# Altium PCB STM32_display_test_board.PcbDoc (part 1 of 2)
Units mil, origin at the board's own origin, x right, y up, seen from the top; angles counter-clockwise.
Board outline 3128.03 x 3003.03 mil, 4 copper layers (Top Layer(SIG/PWR), Int1 (GND), Int2 (GND), Bottom Layer(SIG/PWR)), stack 73.221 mil thick; 85 components, 77 nets, 331 pads, 163 vias.
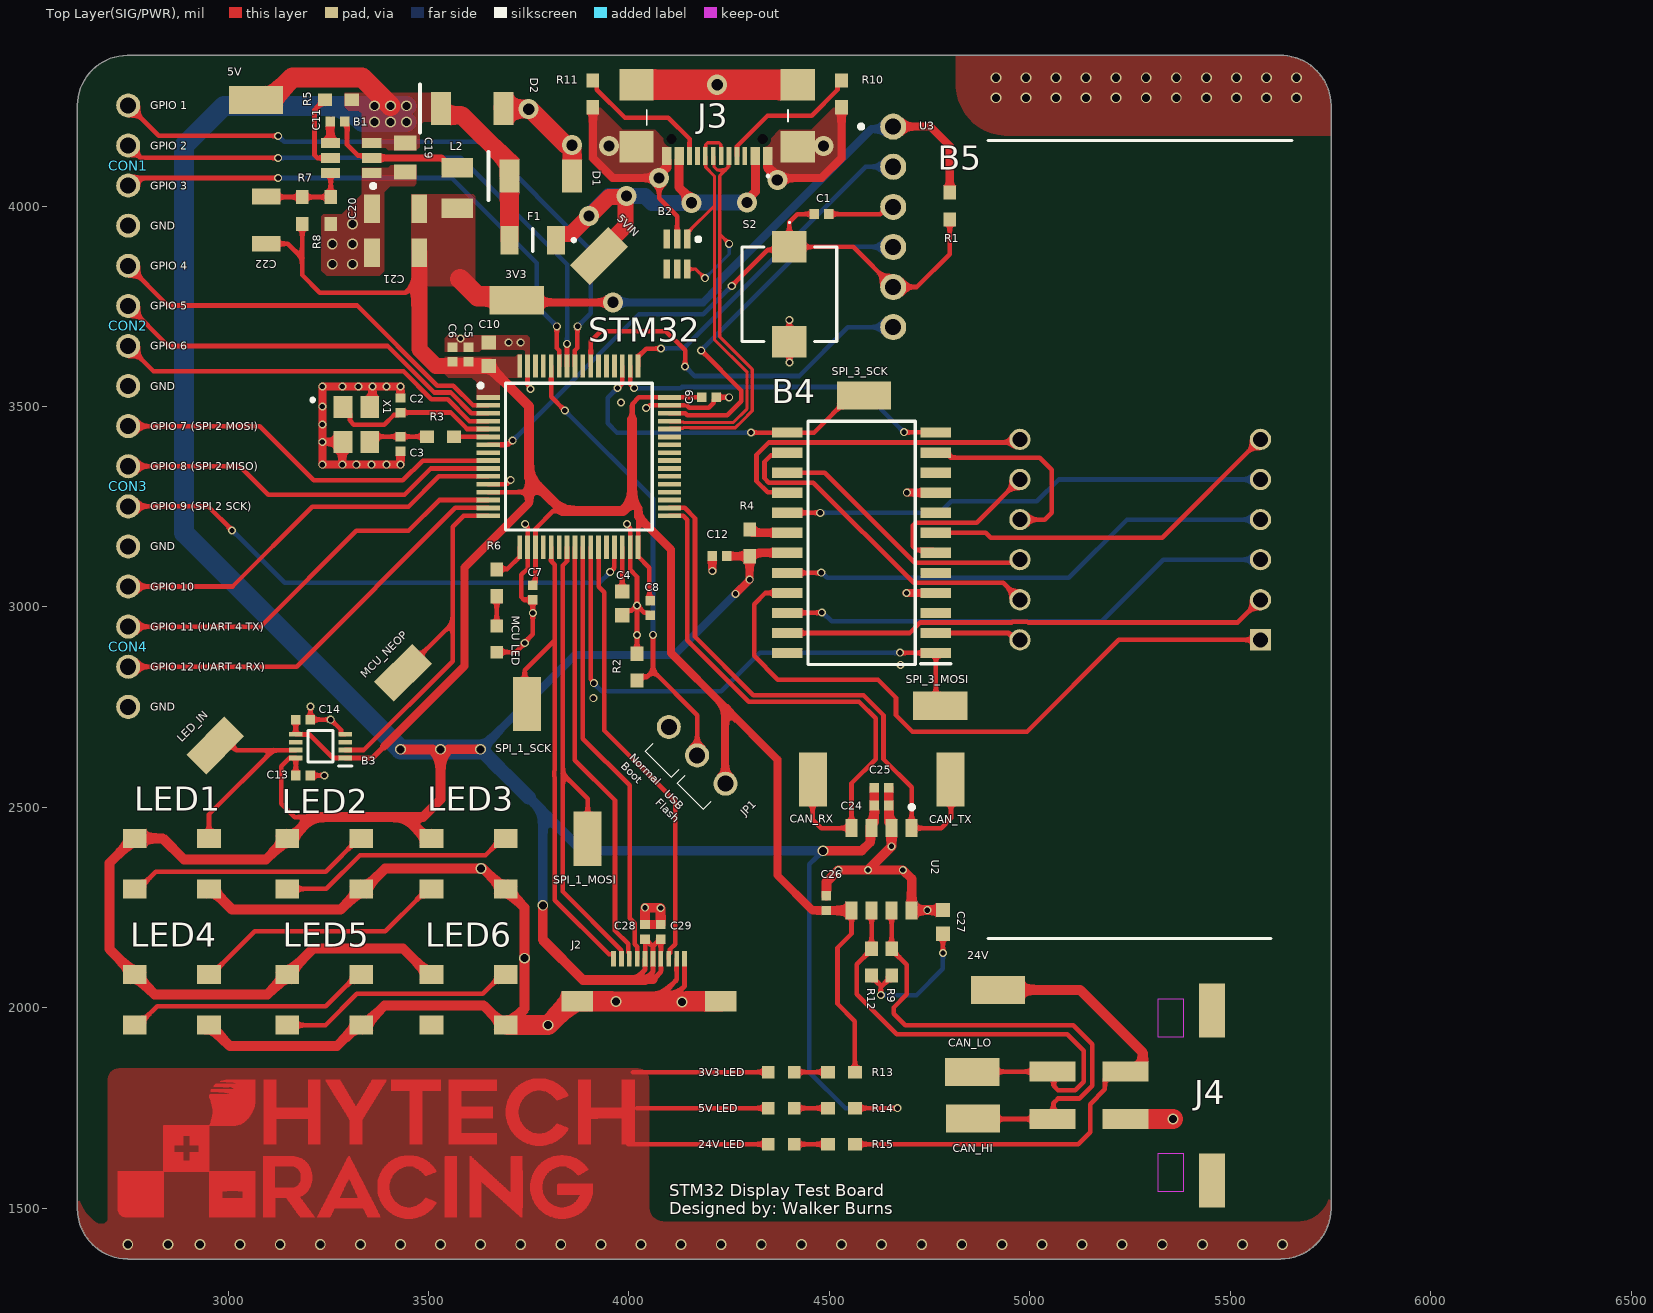
[diagram p0: Top Layer(SIG/PWR) view]
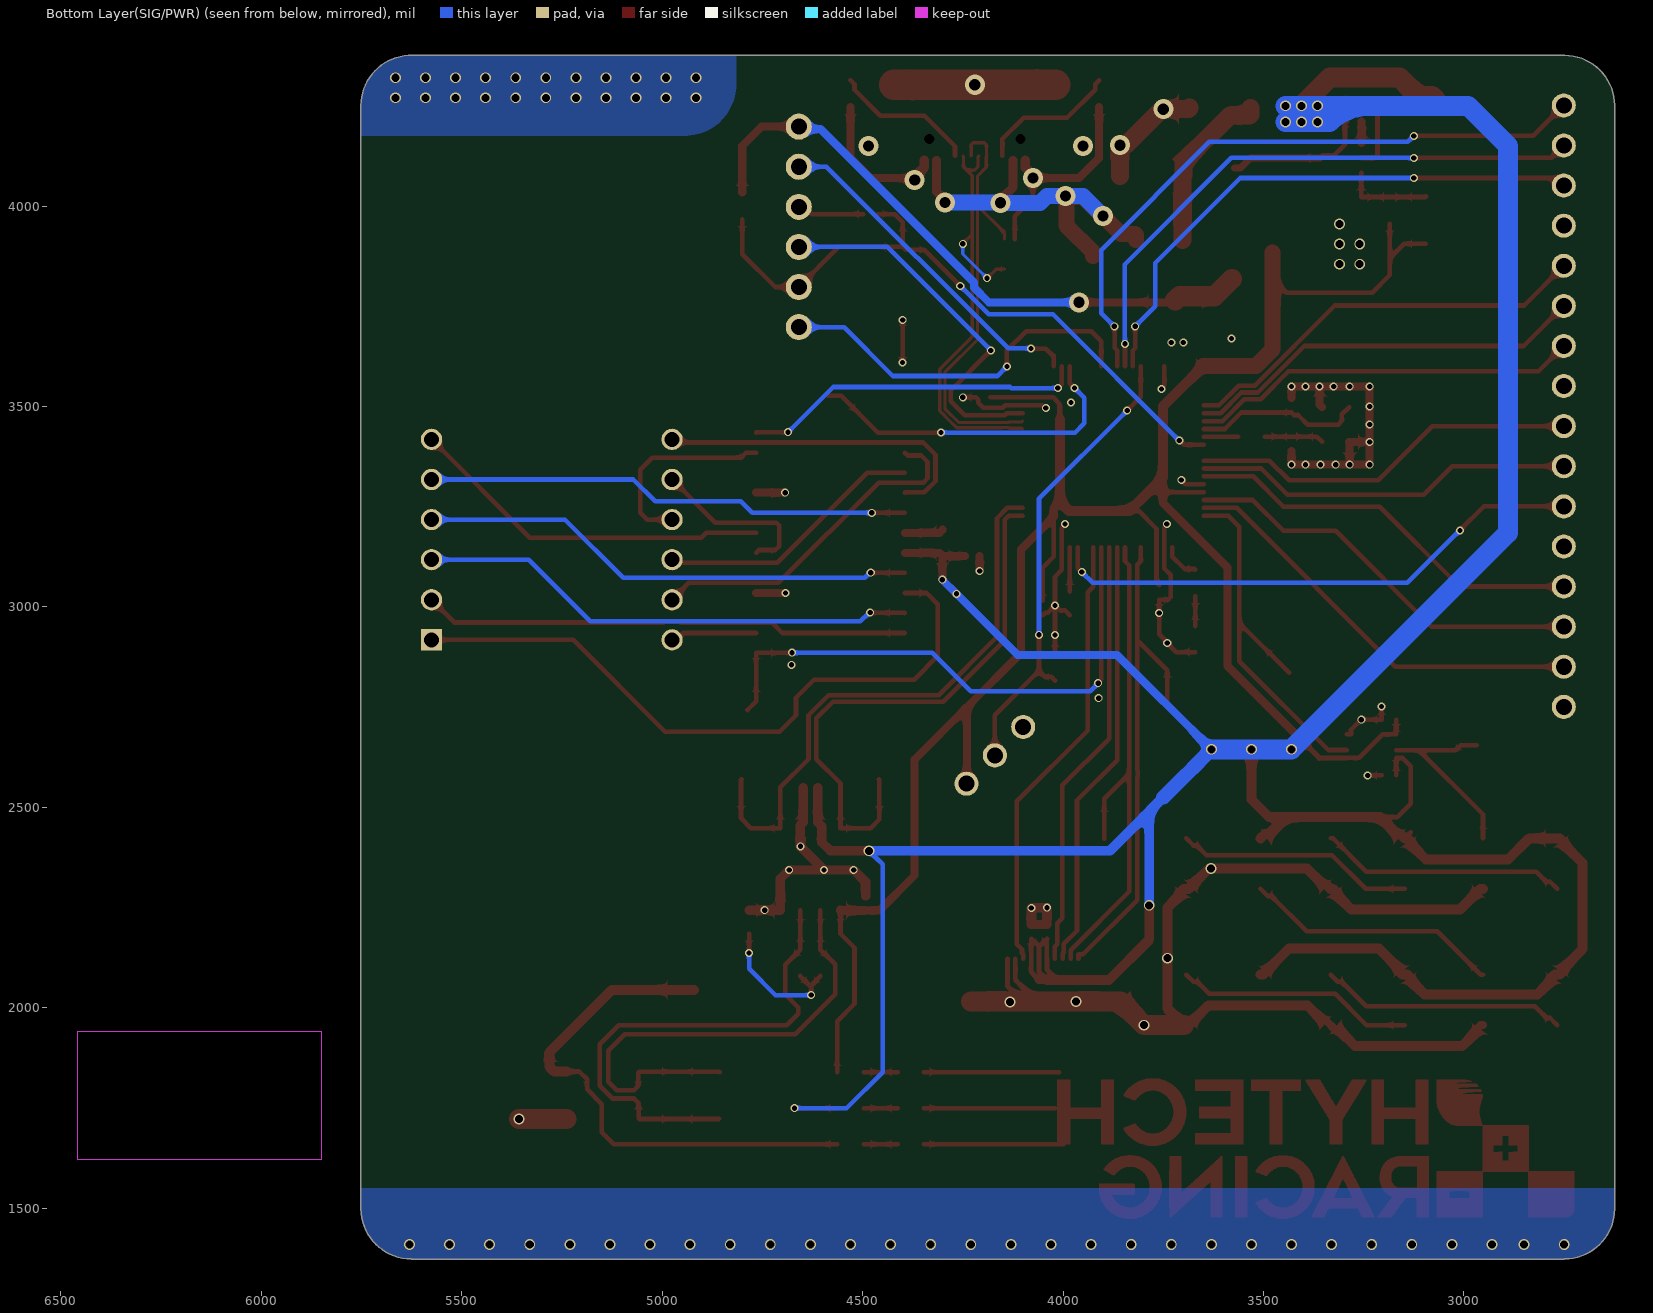
[diagram p1: Bottom Layer(SIG/PWR) view, seen from below]
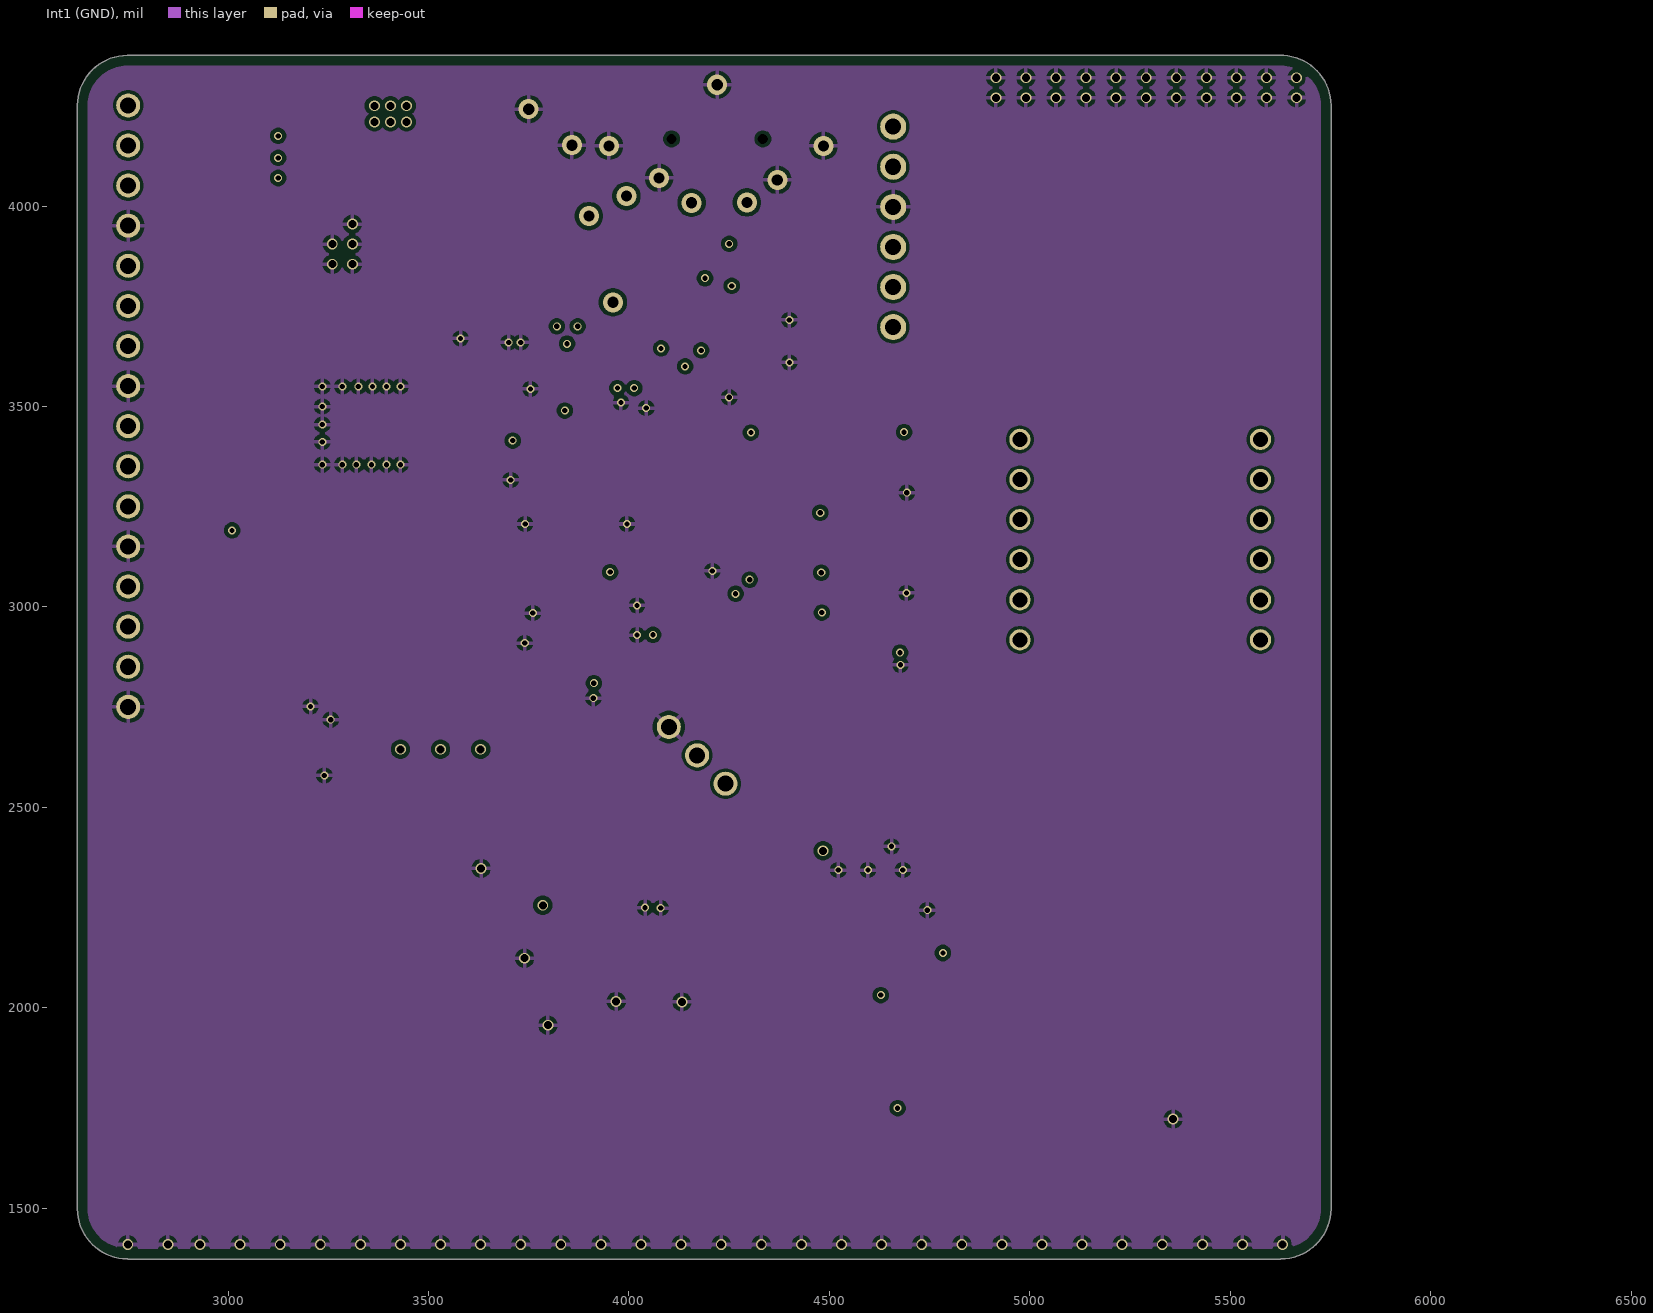
[diagram p2: Int1 (GND)]
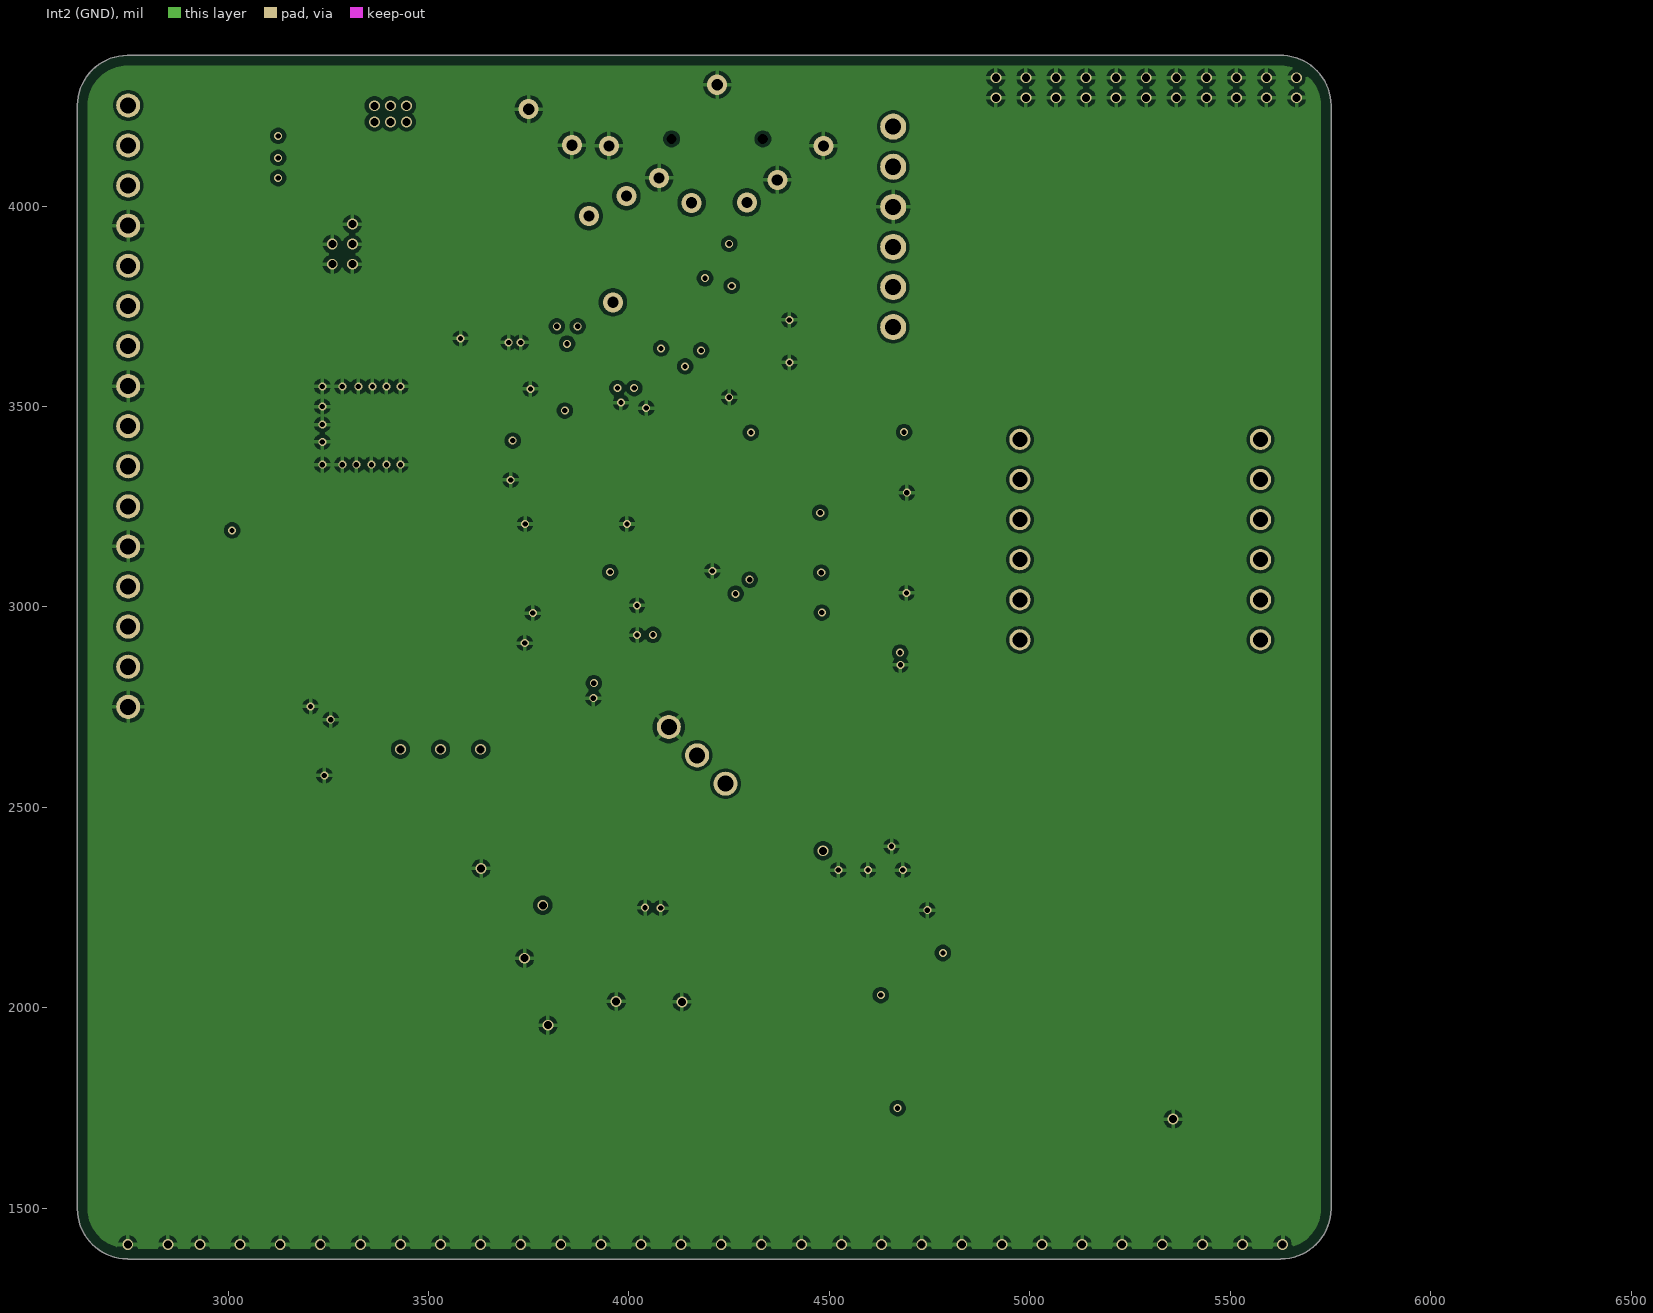
[diagram p3: Int2 (GND)]
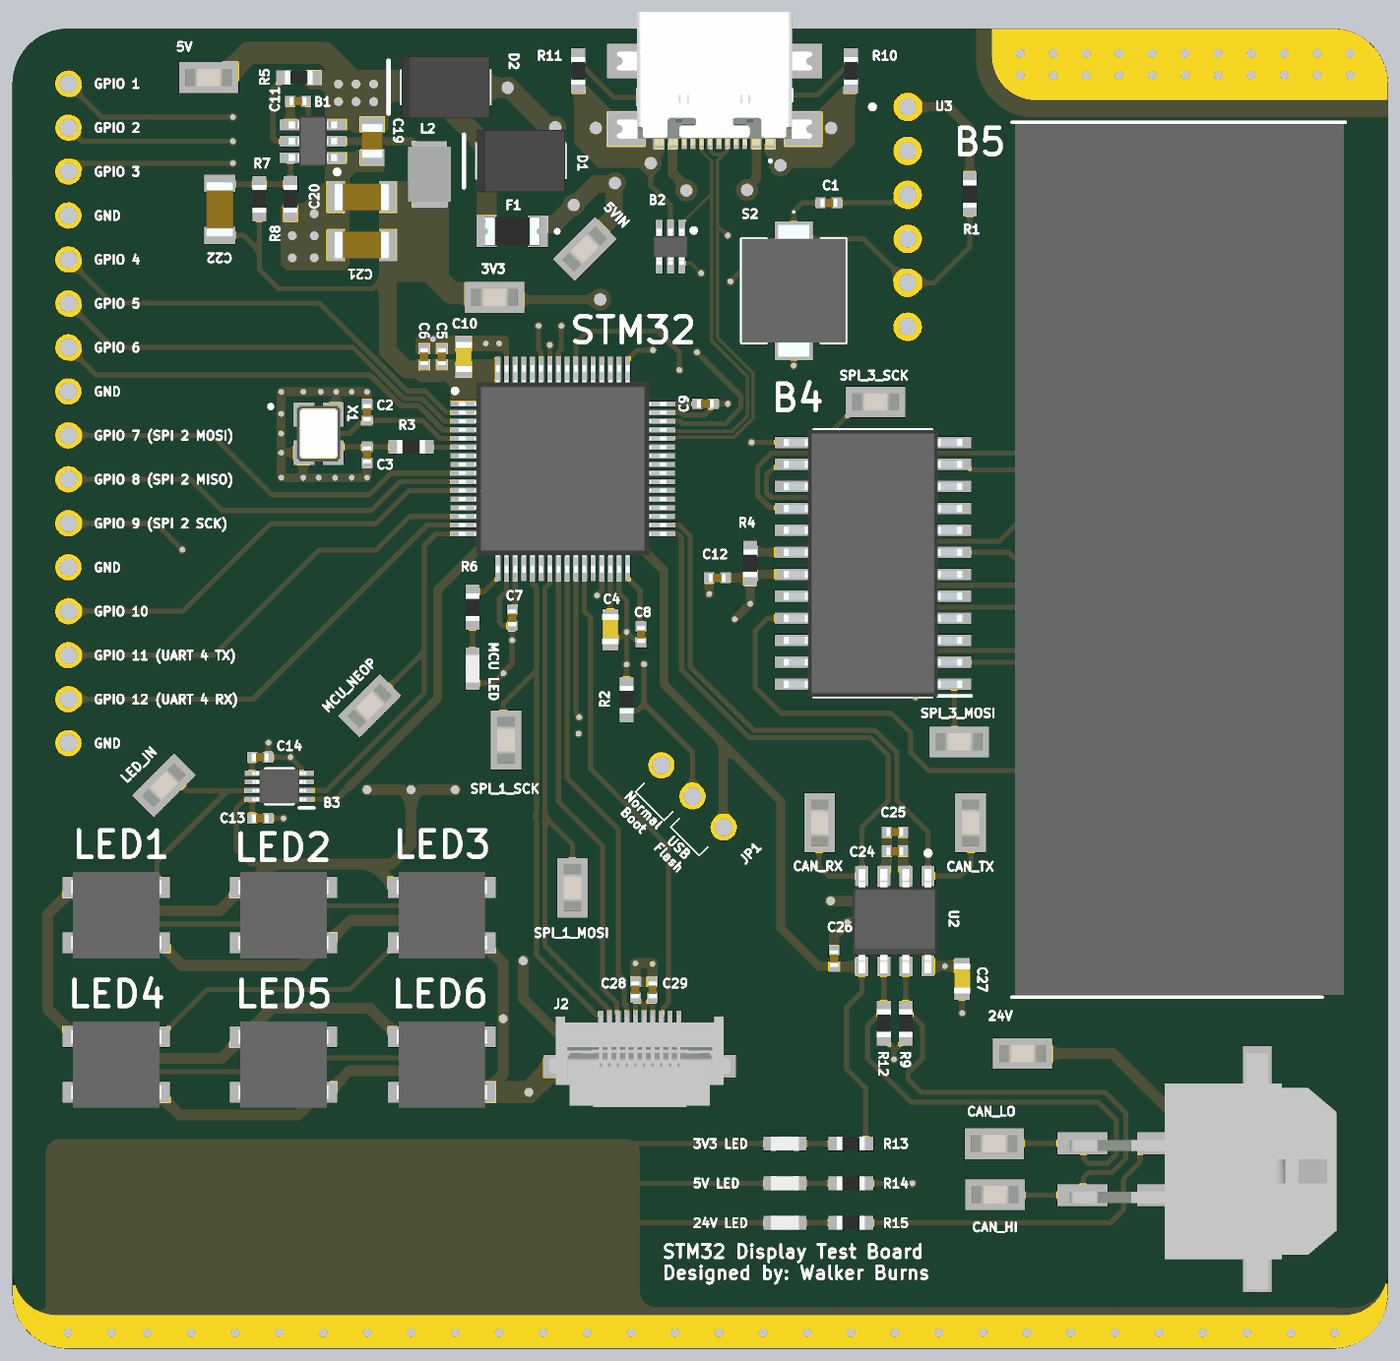
[diagram p5: 3D render of the assembled board from above, using the file's embedded part models]

## Layer stack, top to bottom
Top Solder: solder mask 1, SM-001, Dk 4
Top Layer(SIG/PWR): signal copper 1.378
Dielectric 2: prepreg 8.284, PP-022, Dk 4.5
Int1 (GND): signal copper 5.984
Dielectric 3: core 41.929, Core-039, Dk 4.8
Int2 (GND): signal copper 5.984
Dielectric 4: prepreg 8.284, PP-022, Dk 4.5
Bottom Layer(SIG/PWR): signal copper 1.378
Bottom Solder: solder mask 1, SM-001, Dk 4

## Board outline
2623.99,1498.87 ccw(c2750,1500) 2748.87,1373.99 2750,1373.48 5625,1373.48 5626.13,1373.99 ccw(c5625,1500) 5751.01,1498.87 5751.51,1500 5751.52,4250 5751.01,4251.13 ccw(c5625,4250) 5632.3,4375.8 5631.01,4376.51 2750,4376.52 2748.87,4376.01 ccw(c2750,4250) 2623.99,4251.13 2623.49,4250

## Design rules (kind name [scope] priority, off if disabled: settings)
Clearance [All] p1: gap=10 ignorepadtopadclearanceinfootprint=FALSE except(0: Arc-Hole Track-Hole SMDPad-Hole Via-Hole Fill-Hole Poly-Hole Region-Hole Text-Text Text-Hole; 5: Arc-Arc Arc-Track Arc-SMDPad Track-Track Track-SMDPad SMDPad-SMDPad; 7.87: Arc-Text Track-Text SMDPad-Fill SMDPad-Poly SMDPad-Region THPad-Fill THPad-Poly THPad-Region Fill-Fill Fill-Poly Fill-Region Poly-Poly Poly-Region Region-Region; 12.99: Arc-THPad Track-THPad SMDPad-THPad; 19.68: THPad-THPad THPad-Hole)
DiffPairsRouting [All] p1: maxlimit=10 minlimit=5 mostfreqgap=10 toplayer_maxgap=5 toplayer_prefgap=5 toplayer_minwidth=7.81 toplayer_maxwidth=7.81 toplayer_prefwidth=7.81 bottomlayer_maxgap=5 bottomlayer_prefgap=5 bottomlayer_minwidth=7.81 bottomlayer_maxwidth=7.81 bottomlayer_prefwidth=7.81 impedanceprofiledriven=TRUE impedanceprofileid={41886173-6EE0-4018-A958-A0CD32709ABE} impedanceprofilevalue=90.000000 maxuncoupledlength=500
HoleSize Pad_HoleSize [IsPad] p1: absolutevalues=TRUE maxlimit=248.03 minlimit=19.68 maxpercent=80.000 minpercent=20.000
HoleSize [All] p2: absolutevalues=TRUE maxlimit=248.03 minlimit=7.87 maxpercent=80.000 minpercent=20.000
MinimumSolderMaskSliver [All] p1: minsoldermaskwidth=3.94
PolygonConnect GND_PolygonConnect [OnLayer('Int1 (GND)') OR OnLayer('Int2 (GND)')] p1: connectstyle=Relief reliefconductorwidth=10 reliefentries=4 polygonreliefangle="90 Angle" airgapwidth=10
PolygonConnect [All] p2: connectstyle=Direct reliefconductorwidth=10 reliefentries=4 polygonreliefangle="90 Angle" airgapwidth=10
RoutingVias [All] p1: holewidth=28 width=50 viastyle="Through Hole" minholewidth=7.87 minwidth=9.84 maxholewidth=28 maxwidth=50
SilkToSilkClearance [All] p1: silktosilkclearance=0
SilkToSolderMaskClearance [IsPad] p1: minsilkscreentomaskgap=5.91 clearancetoexposedcopper=TRUE
SolderMaskExpansion [All] p1: expansion=1.5 istentingtop=FALSE
Width [All] p1: maxlimit=78.74 minlimit=7.87 preferedwidth=10
25 further rules are at their usual default settings.

## Classes and differential pairs
component class Power: 3V3 "3V3 LED" 5V "5V LED" 5VIN 24V "24V LED" B1 C11 C19 C20 C21 C22 D1 D2 F1 FRAME2 L2 "MCU LED" R5 R6 R7 R8 R13 R14 R15
component class MCU: C1 C2 C3 C4 C5 C6 C7 C8 C9 C10 FRAME1 JP1 R1 R2 R3 S2 STM32 X1
component class Connect: B2 B3 B4 B5 C12 C13 C14 C24 C25 C26 C27 C28 C29 CAN_HI CAN_LO CAN_RX CAN_TX CON1 CON2 CON3 CON4 FRAME3 J2 J3 J4 LED1 LED2 LED3 LED4 LED5 LED6 LED_IN MCU_NEOP R4 R9 R10 R11 R12 SPI_1_MOSI SPI_1_SCK SPI_3_MOSI SPI_3_SCK U2 U3
differential pair MCU_USB: +MCU_USB_P -MCU_USB_N

## Components (designator, comment, footprint, x,y, rotation, side; value= is the part's Value field where it differs from the comment)
3V3 "Test Point for Probing" 5015 3720,3765 r0 top
"3V3 LED" "APT1608SGC" 0603-LED 4380,1840 r0 top
5V "Test Point for Probing" 5015 3070,4265 r0 top
"5V LED" "APT1608SGC" 0603-LED 4380,1750 r0 top
5VIN "Test Point for Probing" 5015 3925,3875 r45 top
24V "Test Point for Probing" 5015 4920,2045 r180 top
"24V LED" "APT1608SGC" 0603-LED 4380,1660 r0 top
B1 "TPS54202DDCR" SOT-23-6 3307,4120 r90 top
B2 "TPD4E1U06DCKR" SC-70-6 4120,3880 r270 top
B3 "SN74LXC2T45DCUR" VSSOP-8 3230.58,2652.92 r180 top
B4 "MAX7221EWG+" SOIC-24 4580,3160 r180 top
B5 "LTC-5723HR" 7SEGMENT_DISP_12_P_TH 5275,3168 r180 top
C1 "100n" 0402_CAP 4480,3980 r180 top
C2 "10p" 0402_CAP 3430,3503.11 r270 top
C3 "10p" 0402_CAP 3430,3406.89 r90 top
C4 "4u7" 0603-CAP 3983,3009 r270 top
C5 "100n" 0402_CAP 3600,3630 r270 top
C6 "100n" 0402_CAP 3560,3630 r270 top
C7 "100n" 0402_CAP 3760,3036 r90 top
C8 "100n" 0402_CAP 4053,2998 r90 top
C9 "100n" 0402_CAP 4199,3523 r180 top
C10 "1u" 0603-CAP 3650,3630.47 r90 top
C11 "100n" 0402_CAP 3273.11,4211 r180 top
C12 "100n" 0402_CAP 4226,3127 r0 top
C13 "100n" 0402_CAP 3187.11,2580 r0 top
C14 "100n" 0402_CAP 3187,2719 r180 top
C19 "10u" 0805-CAP 3442,4121 r270 top
C20 "22u" 1206-CAP 3418.06,3993 r180 top
C21 "22u" 1206-CAP 3418.06,3884 r180 top
C22 "56p" 1206-CAP 3095,3965 r90 top
C24 "100n" 0402_CAP 4630,2505 r180 top
C25 "100n" 0402_CAP 4630,2549 r180 top
C26 "100n" 0402_CAP 4492,2261.11 r270 top
C27 "4n7" 0603-CAP 4783,2214.53 r270 top
C28 "100n" 0402_CAP 4040,2190 r270 top
C29 "100n" 0402_CAP 4079,2190 r270 top
CAN_HI "Test Point for Probing" 5015 4858,1724 r180 top
CAN_LO "Test Point for Probing" 5015 4856,1840 r180 top
CAN_RX "Test Point for Probing" 5015 4459,2570 r90 top
CAN_TX "Test Point for Probing" 5015 4802,2570 r90 top
CON1 "HEAD_4_P" 1X04 2751,4251 r0 top
CON2 "HEAD_4_P" 1X04 2751,3851 r0 top
CON3 "HEAD_4_P" 1X04 2751,3451 r0 top
CON4 "HEAD_4_P" 1X04 2751,3051 r0 top
D1 "TVS" DO-214AA 3780,4075 r180 top
D2 "Zener" DO-214AA 3609,4243 r180 top
F1 "1206L050YR" 1206-FUSE 3760,3915 r180 top
J2 "505110-1092" MOLEX_FPC_CLAMSHELL_10 4050,2025 r0 top
J3 "CONNECTOR_USB_C" USB4110GFA 4220,4270 r180 top
J4 "HyTech CAN Connector" MOLEX_MICROFIT_SMD_RIGHTANGLE_04_DUAL 5454,1782 r90 top
JP1 "Jumper" 1X03 4240.71,2559.29 r135 top
L2 "10u" 1210_IND 3572,4045 r270 top
LED1 "IN-PI55QATPRPGPBPW-40  Neopixel RGBW LED  Datasheet" NEOPIXEL 2860,2360 r0 top
LED2 "IN-PI55QATPRPGPBPW-40  Neopixel RGBW LED  Datasheet" NEOPIXEL 3240,2360 r0 top
LED3 "IN-PI55QATPRPGPBPW-40  Neopixel RGBW LED  Datasheet" NEOPIXEL 3600,2360 r0 top
LED4 "IN-PI55QATPRPGPBPW-40  Neopixel RGBW LED  Datasheet" NEOPIXEL 2860,2020 r0 top
LED5 "IN-PI55QATPRPGPBPW-40  Neopixel RGBW LED  Datasheet" NEOPIXEL 3240,2020 r0 top
LED6 "IN-PI55QATPRPGPBPW-40  Neopixel RGBW LED  Datasheet" NEOPIXEL 3600,2020 r0 top
LED_IN "Test Point for Probing" 5015 2968,2655 r45 top
"MCU LED" "APT1608SGC" 0603-LED 3670,2920 r90 top
MCU_NEOP "Test Point for Probing" 5015 3436,2836 r45 top
R1 "10k" 0603-RES 4800,4000 r270 top
R2 "10k" 0603-RES 4020,2850 r90 top
R3 "0R" 0603-RES 3530,3425 r0 top
R4 "9.53k" 0603-RES 4301,3160 r270 top
R5 "100k" 0603-RES 3275,4265 r180 top
R6 "220" 0603-RES 3670,3060 r270 top
R7 "100k" 0603-RES 3185,3989 r90 top
R8 "22k" 0603-RES 3256,3989 r270 top
R9 "60R4" 0603-RES 4655,2114 r270 top
R10 "5k1" 0603-RES 4530,4280 r270 top
R11 "5k1" 0603-RES 3910,4280 r270 top
R12 "60R4" 0603-RES 4605,2114 r90 top
R13 "220" 0603-RES 4530,1840 r180 top
R14 "550" 0603-RES 4530,1750 r180 top
R15 "4k4" 0603-RES 4530,1660 r180 top
S2 "Button Datasheet" EVPCD8C1A000 4400,3780 r270 top
SPI_1_MOSI "Test Point for Probing" 5015 3897,2422 r270 top
SPI_1_SCK "Test Point for Probing" 5015 3746,2758 r270 top
SPI_3_MOSI "Test Point for Probing" 5015 4776.26,2753.74 r180 top
SPI_3_SCK "Test Point for Probing" 5015 4586,3527 r180 top
STM32 "STM32F446RET6" LQFP-64-STM32 3875,3375 r0 top
U2 "TCAN1051" "SOIC-08(NARROW,0-15\")" 4630,2346 r180 top
U3 "ST_LINK_SW_DEBUG" HEADER_6_P 4659,3698 r0 top
X1 "Crystal  Datasheet Recommended load capacitor for the ECS-160-10-42-CKM-TR:  VJ0603A150FXQPW1BC" XTAL_SMD3225-4P 3320,3455 r270 top

## Footprints (in the part's own frame and the unit in brackets; to place one, negate y for a bottom-side part, rotate by r counter-clockwise, add the part's x,y. Pads: shape width x height; smd on the part's side, far side on the other; paste and mask are expansions set on the pad)
1X03 [mil]
  round 60 hole 40: 1(0,0) 2(100,0) 3(200,0)
1X04 [mil]
  round 60 hole 40: 1(0,0) 2(0,-100) 3(0,-200) 4(0,-300)
7SEGMENT_DISP_12_P_TH [mm]
  rect 1.35x1.35 / inner round 1.35 / far side rect 1.35x1.35 hole 0.95: 1(-7.62,6.35)
  round 1.35 hole 0.95: 2(-7.62,3.81) 3(-7.62,1.27) 4(-7.62,-1.27) 5(-7.62,-3.81) 6(-7.62,-6.35) 7(7.62,-6.35) 8(7.62,-3.81) 9(7.62,-1.27) 10(7.62,1.27) 11(7.62,3.81) 12(7.62,6.35)
  silkscreen extent -9.62,-25.27 9.62,25.27, body extent -9.55,-25.15 9.45,25.15, height 8.25
0402_CAP [mm]
  rect 0.6x0.62 smd: 1(-0.46,0) 2(0.46,0)
  body extent -0.5,-0.25 0.5,0.25, height 0.33
0603-CAP [mil]
  rect 35.43x35.43 smd: 1(-29.53,0) 2(29.53,0)
  body extent -36,-19 33,19, height 36
0603-LED [mil]
  rect 31.5x31.5 smd: 1(-32.48,0) 2(32.48,0)
  body extent -31,-16 31,16, height 18
0603-RES [mil]
  rect 35.43x31.5 smd: 1(-33.46,0) 2(33.46,0)
  body extent -31,-16 31,16, height 22
0805-CAP [mil]
  rect 37.4x55.12 smd: 1(-36.42,0) 2(36.42,0)
  body extent -40,-25 40,25, height 37
1206-CAP [mm]
  rect 1x1.8 smd: 1(-1.5,0) 2(1.5,0)
  body extent -1.6,-0.8 1.6,0.8, height 0.94
1206-FUSE [mm]
  rect 1.16x1.82 smd: 1(-1.475,0) 2(1.475,0)
  silkscreen extent -2.7,-0.72 0,0.72, body extent -1.6,-0.83 1.6,0.83, height 1.25
1210_IND [mm] "Inductor of 1210 Case  Size"
  rect 1.25x2 smd: 1(-1.275,0) 2(1.275,0)
  body extent -1.6,-1.25 1.6,1.25, height 1.7
5015 [mil]
  rect 135x70 smd: 1(0,0)
  body extent -53,-20 53,20, height 58
DO-214AA [mil]
  rect 50x82.68 smd: 1(-77.95,0) 2(77.95,0)
  silkscreen extent 130,-60 130,60, body extent -104,-71 104,71, height 96
EVPCD8C1A000 [mm] "Small SPST pushbutton"
  rect 2x2.2 smd: 1(-3,0) 2(3,0)
  silkscreen extent -4.6,-3 3,3, body extent -3.8,-3 3.8,3, height 4.3
HEADER_6_P [mil]
  round 65 hole 40: 1(0,500) 2(0,400) 3(0,300) 4(0,200) 5(0,100) 6(0,0)
  silkscreen extent -85,495 -75,505
LQFP-64-STM32 [mm] "64 pin LQFP package for STM32F446RET6 and similar"
  rect 1.475x0.3 smd: 1(-5.738,3.75) 2(-5.738,3.25) 3(-5.738,2.75) 4(-5.738,2.25) 5(-5.738,1.75) 6(-5.738,1.25) 7(-5.738,0.75) 8(-5.738,0.25) 9(-5.738,-0.25) 10(-5.738,-0.75) 11(-5.738,-1.25) 12(-5.738,-1.75) 13(-5.738,-2.25) 14(-5.738,-2.75) 15(-5.738,-3.25) 16(-5.738,-3.75) 33(5.738,-3.75) 34(5.738,-3.25) 35(5.738,-2.75) 36(5.738,-2.25) 37(5.738,-1.75) 38(5.738,-1.25) 39(5.738,-0.75) 40(5.738,-0.25) 41(5.738,0.25) 42(5.738,0.75) 43(5.738,1.25) 44(5.738,1.75) 45(5.738,2.25) 46(5.738,2.75) 47(5.738,3.25) 48(5.738,3.75)
  rect 0.3x1.475 smd: 17(-3.75,-5.738) 18(-3.25,-5.738) 19(-2.75,-5.738) 20(-2.25,-5.738) 21(-1.75,-5.738) 22(-1.25,-5.738) 23(-0.75,-5.738) 24(-0.25,-5.738) 25(0.25,-5.738) 26(0.75,-5.738) 27(1.25,-5.738) 28(1.75,-5.738) 29(2.25,-5.738) 30(2.75,-5.738) 31(3.25,-5.738) 32(3.75,-5.738) 49(3.75,5.738) 50(3.25,5.738) 51(2.75,5.738) 52(2.25,5.738) 53(1.75,5.738) 54(1.25,5.738) 55(0.75,5.738) 56(0.25,5.738) 57(-0.25,5.738) 58(-0.75,5.738) 59(-1.25,5.738) 60(-1.75,5.738) 61(-2.25,5.738) 62(-2.75,5.738) 63(-3.25,5.738) 64(-3.75,5.738)
  silkscreen extent -6.35,-4.65 4.65,4.65, body extent -6,-6 6,6, height 1.6
MOLEX_FPC_CLAMSHELL_10 [mm]
  rect 0.3x1 smd: 1(-2.25,2.475) 2(-1.75,2.475) 3(-1.25,2.475) 4(-0.75,2.475) 5(-0.25,2.475) 6(0.25,2.475) 7(0.75,2.475) 8(1.25,2.475) 9(1.75,2.475) 10(2.25,2.475)
  rect 2x1.3 smd: 11(-4.55,-0.225) 12(4.55,-0.225)
  body extent -5.25,-2.6 5.25,2.7, height 1.88
MOLEX_MICROFIT_SMD_RIGHTANGLE_04_DUAL [mil]
  rect 50x115 smd: 1(59.06,215.5) 2(-59.06,215.5) 3(59.06,397.5) 4(-59.06,397.5)
  rect 135x65 smd: PAD1(212.06,0) PAD2(-212.06,0)
  Top Layer(SIG/PWR) keep-out region: -240.56,71 -240.56,134 -144.56,134 -144.56,71
  Top Layer(SIG/PWR) keep-out region: -240.56,71 -240.56,134 -144.56,134 -144.56,71
  Top Layer(SIG/PWR) keep-out region: 144.56,71 144.56,134 240.56,134 240.56,71
  Top Layer(SIG/PWR) keep-out region: 144.56,71 144.56,134 240.56,134 240.56,71
  Bottom Layer(SIG/PWR) keep-out region: -159.06,-1005 -159.06,-395 159.06,-395 159.06,-1005
  body extent -274,-180 264,426, height 345
NEOPIXEL [mm]
  rect 1.5x1.2 smd: 1(-2.35,1.6) 2(-2.35,-1.6) 3(2.35,-1.6) 4(2.35,1.6)
  body extent -2.6,-2.5 2.6,2.5, height 1.7
SC-70-6 [mm]
  rect 1.2x0.4 smd: 1(-0.95,0.65) 2(-0.95,0) 3(-0.95,-0.65) 4(0.95,-0.65) 5(0.95,0) 6(0.95,0.65)
  silkscreen extent -1.06,1.22 -0.82,1.46, body extent -1.05,-1 1.05,1, height 1
"SOIC-08(NARROW,0-15\")" [mil]
  rect 30x45 smd: 1(-75,-102.5) 2(-25,-102.5) 3(25,-102.5) 4(75,-102.5) 5(75,102.5) 6(25,102.5) 7(-25,102.5) 8(-75,102.5)
  silkscreen extent -81,-160 -70,-149, body extent -97,-119 97,119, height 64
SOIC-24 [mm]
  rect 1.925x0.65 smd: 1(-4.712,6.985) 2(-4.712,5.715) 3(-4.712,4.445) 4(-4.712,3.175) 5(-4.712,1.905) 6(-4.712,0.635) 7(-4.712,-0.635) 8(-4.712,-1.905) 9(-4.712,-3.175) 10(-4.712,-4.445) 11(-4.712,-5.715) 12(-4.712,-6.985) 13(4.712,-6.985) 14(4.712,-5.715) 15(4.712,-4.445) 16(4.712,-3.175) 17(4.712,-1.905) 18(4.712,-0.635) 19(4.712,0.635) 20(4.712,1.905) 21(4.712,3.175) 22(4.712,4.445) 23(4.712,5.715) 24(4.712,6.985)
  silkscreen extent -5.68,-7.7 3.4,7.7, body extent -5.16,-7.7 5.16,7.7, height 2.65
SOT-23-6 [mm]
  rect 0.62x1.22 smd: 1(-0.95,-1.31) 2(0,-1.31) 3(0.95,-1.31) 4(-0.95,1.31) 5(0,1.31) 6(0.95,1.31)
  silkscreen extent -1.9,-1.52 -1.65,-1.27, body extent -1.45,-1.4 1.45,1.4, height 1.1
USB4110GFA [mm] "Footprint for USB4110-GF-A USB C Connector"
  rect 0.3x1.15 smd: A1(-3.35,3.678) A4(-2.55,3.678) A5(-1.25,3.678) A6(-0.25,3.678) A7(0.25,3.678) A8(1.25,3.678) A9(2.55,3.678) A12(3.35,3.678) B1(3.05,3.678) B4(2.25,3.678) B5(1.75,3.678) B6(0.75,3.678) B7(-0.75,3.678) B8(-1.75,3.678) B9(-2.25,3.678) B12(-3.05,3.678)
  round 0.325 hole 0.65 unplated: MH1(-2.89,2.603) MH2(2.89,2.603)
  rect 2.18x2 smd: MP1(-5.11,-0.827) MP2(5.11,-0.827) MP3(-5.11,3.103) MP4(5.11,3.103)
  silkscreen extent -4.5,0.75 4.47,5, body extent -5.65,-3.67 5.65,4.03, height 3.26
VSSOP-8 [mm]
  rect 0.85x0.3 smd: 1(-1.575,0.75) 2(-1.575,0.25) 3(-1.575,-0.25) 4(-1.575,-0.75) 5(1.575,-0.75) 6(1.575,-0.25) 7(1.575,0.25) 8(1.575,0.75)
  silkscreen extent -2,-1 0.8,1.25, body extent -1.55,-1 1.55,1, height 0.77
XTAL_SMD3225-4P [mm]
  rect 1.4x1.2 smd: 1(-1.1,-0.85) 2(1.1,-0.85) 3(1.1,0.85) 4(-1.1,0.85)
  silkscreen extent -1.62,-2.82 -1.5,-2.72, body extent -1.6,-1.25 1.6,1.25, height 0.7

## Part data
3V3 5V 5VIN 24V CAN_HI CAN_LO CAN_RX CAN_TX LED_IN MCU_NEOP SPI_1_MOSI SPI_1_SCK SPI_3_MOSI SPI_3_SCK: library part TEST_POINT, Manufacturer="Keystone Electronics", MPN=5015, DeviceSetName=TEST_POINT, DKPN=36-5015CT-ND, GateName_1=G$1, LibraryName=HyTechDevices, MOPN=534-5015, Package=5015, SymbolName_1=TEST_POINT
"3V3 LED" "5V LED" "24V LED" "MCU LED": library part LED_?_*0603, Color=Blue, Manufacturer=Kingbright, MPN=APT1608VBC/D, Package=0603-LED, DeviceName=0603, DeviceSetName=LED_?_*, DKPN=754-1789-1-ND, GateName_1=LED, LibraryName=HyTechDevices, MOPN=604-APT1608VBC/D, SymbolName_1=DIODE_LED
B1: "4.5V to 28V Input, 2A Output, EMI Friendly Synchronous Step-Down Converter", Manufacturer_Name="Texas Instruments", Mouser Part Number=595-TPS54202DDCR, Datasheet Link=http://www.ti.com/lit/gpn/tps54202, Geometry.Height=1.1mm, Manufacturer_Part_Number=TPS54202DDCR, Mouser Price/Stock=https://www.mouser.co.uk/ProductDetail/Texas-Instruments/TPS54202DDCR?qs=uP22XH7NdCsJtN%2Fq54jCtQ%3D%3D
B2: "Quad-Channel High-Speed ESD Protection Device", Manufacturer_Name="Texas Instruments", Mouser Part Number=595-TPD4E1U06DCKR, Datasheet Link=http://www.ti.com/lit/gpn/tpd4e1u06, Geometry.Height=1.1mm, Manufacturer_Part_Number=TPD4E1U06DCKR, Mouser Price/Stock=https://www.mouser.co.uk/ProductDetail/Texas-Instruments/TPD4E1U06DCKR?qs=FBI%252BX3tnPf27UOVCu86Dnw%3D%3D
B3: library part LEVEL_SHIFTER_3V3_TO_5V, "Translation - Voltage Levels 2-bit dual supply transceiver with configurable voltage-level shifting and 3-state outputs", Manufacturer_Name="Texas Instruments", Mouser Part Number=595-SN74LXC2T45DCUR, Datasheet Link=https://www.ti.com/lit/ds/symlink/sn74lxc2t45.pdf?ts=1639472823475&ref_url=https%253A%252F%252Fwww.ti.com%252Fproduct%252FSN74LXC2T45%253FkeyMatch%253DSN74LXC2T45DCUR%2526tisearch%253Dsearch-everything%2526usecase%253DOPN, Geometry.Height=0.9mm, Manufacturer_Part_Number=SN74LXC2T45DCUR, Mouser Price/Stock=https://www.mouser.co.uk/ProductDetail/Texas-Instruments/SN74LXC2T45DCUR?qs=TCDPyi3sCW3DKJ9sPzuW6Q%3D%3D
B4: "MAX7221EWG+, LED Display Driver, 8-Digits 64-Segments, 4  5.5 V, 24-Pin SOIC W", Manufacturer_Name="Analog Devices", Mouser Part Number=700-MAX7221EWG, Datasheet Link=http://datasheets.maximintegrated.com/en/ds/MAX7219-MAX7221.pdf, Geometry.Height=2.65mm, Manufacturer_Part_Number=MAX7221EWG+, Mouser Price/Stock=https://www.mouser.co.uk/ProductDetail/Analog-Devices-Maxim-Integrated/MAX7221EWG%2b?qs=1THa7WoU59EcwjgGV%252Bu7MA%3D%3D
B5: library part LED_7_SEGMENT_4_DIGIT, "LED Displays & Accessories 4 Digit, Red Normal Current, Common  Cathode", Manufacturer_Name=Lite-On, Manufacturer_Part_Number=LTC-4627JR, Mouser Part Number=859-LTC-4627JR, Datasheet Link=https://componentsearchengine.com/Datasheets/1/LTC-4627JR.pdf, Geometry.Height=7.25mm, Mouser Price/Stock=https://www.mouser.co.uk/ProductDetail/Lite-On/LTC-4627JR?qs=WxFF5lh7QM3%252BoGt5Rn2nWQ%3D%3D
C1 C5 C6 C7 C8 C9 C11 C12 C13 C14 C24 C25 C26 C28 C29: library part CAPACITOR_?_*0402, Capacitance=0.1µF, Manufacturer=Yageo, MPN=CC0603KRX7R0BB104, Package=0603-CAP, Tolerance=10%, Voltage=100V, DeviceName=0603, DeviceSetName=CAPACITOR_?_*, DKPN=311-1523-1-ND, GateName_1=G$1, LibraryName=HyTechDevices, MOPN=603-CC603KRX7R0BB104, SymbolName_1=CAPACITOR
C2 C3: library part CAPACITOR_?_*0402, "C0G", Capacitance=0.1µF, Manufacturer=Yageo, MPN=CC0603KRX7R0BB104, Package=0603-CAP, Tolerance=10%, Voltage=100V, DeviceName=0603, DeviceSetName=CAPACITOR_?_*, DKPN=311-1523-1-ND, GateName_1=G$1, LibraryName=HyTechDevices, MOPN=603-CC603KRX7R0BB104, SymbolName_1=CAPACITOR
C4 C10 C27: library part CAPACITOR_?_*0603, Capacitance=0.1µF, Manufacturer=Yageo, MPN=CC0603KRX7R0BB104, Package=0603-CAP, Tolerance=10%, Voltage=100V, DeviceName=0603, DeviceSetName=CAPACITOR_?_*, DKPN=311-1523-1-ND, GateName_1=G$1, LibraryName=HyTechDevices, MOPN=603-CC603KRX7R0BB104, SymbolName_1=CAPACITOR
C19: library part CAPACITOR_?_*0805, Capacitance=0.22µF, Manufacturer=KEMET, MPN=C0805C224K1RACTU, Package=0805-CAP, Tolerance=10%, Voltage=100V, DeviceName=0805, DeviceSetName=CAPACITOR_?_*, DKPN=399-8049-1-ND, GateName_1=G$1, LibraryName=HyTechDevices, MOPN=80-C0805C224K1R, SymbolName_1=CAPACITOR
C20 C21 C22: library part CAPACITOR_?_*1206, Capacitance=2.2µF, Manufacturer="AVX Corporation", MPN=12061C225K4T2A, Package=1206-CAP, Tolerance=10%, Voltage=100V, DeviceName=1206, DeviceSetName=CAPACITOR_?_*, DKPN=478-12144-1-ND, GateName_1=G$1, LibraryName=HyTechDevices, MOPN=581-12061C225K4T2A, SymbolName_1=CAPACITOR
CON1 CON2 CON3 CON4: library part CONNECTOR_HEADER_4, "4 Pin Standard Header"
D1: library part TVS_?_*DO-214AA, "P6SMB6.8CA", Manufacturer="Bourns Inc.", MPN=1.5SMBJ28A, Package=DO-214AA, Voltage=28V, DeviceName=DO-214AA, DeviceSetName=TVS_?_*, DKPN=118-1.5SMBJ28ATR-ND, GateName_1=G$1, LibraryName=HyTechDevices, MOPN=652-1.5SMBJ28A, SymbolName_1=DIODE_TVS_UNIDIRECTIONAL
D2: library part TVS_?_*DO-214AA, "CZRB5338B-HF", Manufacturer="Bourns Inc.", MPN=1.5SMBJ28A, Package=DO-214AA, Voltage=28V, DeviceName=DO-214AA, DeviceSetName=TVS_?_*, DKPN=118-1.5SMBJ28ATR-ND, GateName_1=G$1, LibraryName=HyTechDevices, MOPN=652-1.5SMBJ28A, SymbolName_1=DIODE_TVS_UNIDIRECTIONAL
F1: library part FUSE_RESETTABLE_1206, "Resettable POLYFUSE 100A 6V Littelfuse 0.5A Surface Mount Resettable Fuse, 6 V dc", Manufacturer_Name=LITTELFUSE, Mouser Part Number=576-1206L050YR, Datasheet Link=https://m.littelfuse.com/~/media/electronics/datasheets/resettable_ptcs/littelfuse_ptc_1206l_datasheet.pdf.pdf, Geometry.Height=0.75mm, Manufacturer_Part_Number=1206L050YR, Mouser Price/Stock=https://www.mouser.co.uk/ProductDetail/Littelfuse/1206L050YR?qs=PWhpLWeW8wckT8hV5jLiAA%3D%3D
J2: library part CONNECTOR-10_MOLEX_FPC_CLAMSHELL, Manufacturer_Name=Molex, Package=5051101092, DeviceSetName=505110-1092, GateName_1=G$1, Height=0mm, LibraryName=505110-1092, Manufacturer_Part_Number=505110-1092, Mouser_Part_Number=538-505110-1092, Mouser_Price-Stock=https://www.mouser.co.uk/ProductDetail/Molex/505110-1092?qs=BA62vJVifGrjJfo6A8tlOw%3D%3D, SymbolName_1=505110-1092
J3: "USB4110-GF-A / GCT USB C Connector", Package=None, Availability="In Stock", Check_prices=https://www.snapeda.com/parts/CSP-USC16-TR/Valcon/view-part/?ref=eda, MF=Valcon, MP=CSP-USC16-TR, Price=None, Purchase-URL=https://pricing.snapeda.com/search/part/CSP-USC16-TR/?ref=eda, SnapEDA_Link=https://www.snapeda.com/parts/CSP-USC16-TR/Valcon/view-part/?ref=snap
J4: library part CONNECTOR-CAN_?_*μF_S_RA, Manufacturer=Molex, MPN=0430450411, Package=MOLEX_MICROFIT_SMD_RIGHTANGLE_04_DUAL, DeviceName=μF_S_RA, DeviceSetName=CONNECTOR-CAN_?_*, DKPN=WM1832CT-ND, GateName_1=G$1, LibraryName=HyTechDevices, MOPN=538-43045-0411, SymbolName_1=CONNECTOR_CAN
JP1: library part JUMPER_3P_2.54, "A standard 2.54 pitch header with three pins used as a jumper"
L2: library part INDUCTOR_1210, CURRENT_RATED=1.4A, CURRENT_SATURATION=2A, INDUCTANCE=56µH, Manufacturer="Wurth Elektronik", MPN=74437349560, Package=WE-LMHI, Tolerance=20%, DCR=342mΩ, DeviceName=WELMHI, DeviceSetName=INDUCTOR_?_*, DKPN=732-11454-2-ND, GateName_1=G$1, LibraryName=HyTechDevices, MOPN=710-74437349560, SymbolName_1=INDUCTOR
LED1 LED2 LED3 LED4 LED5 LED6: library part NEOPIXEL_*IN-PI55QATPRPGPBPW-40, Manufacturer=Inolux, MPN=IN-PI55QATPRPGPBPW-40, Package=NEOPIXEL, DeviceName=IN-PI55QATPRPGPBPW-40, DeviceSetName=NEOPIXEL_*, DKPN=1830-1210-2-ND, GateName_1=G$1, LibraryName=HyTechDevices, MOPN=743-I55QATPRPGPBPW40, SymbolName_1=NEOPIXEL
R1 R2 R3 R4 R5 R6 R7 R8 R9 R10 R11 R12 R13 R14 R15: library part RESISTOR_?_*0603, Manufacturer=Yageo, MPN=RC0603FR-070RL, Package=0603-RES, POWER=0.1W, Resistance=0, Tolerance=1%, VOLTAGE_CONTINUOUS=75V, DeviceName=0603, DeviceSetName=RESISTOR_?_*, DKPN=311-0.0HRCT-ND, GateName_1=G$1, LibraryName=HyTechDevices, MOPN=603-RC0603FR-070RL, SymbolName_1=RESISTOR, VOLTAGE_MAX=75V
S2: library part BUTTON_SPST_SMD, Manufacturer=Omron, MPN=B3S-1000, Package=B3S-100X, DeviceSetName=BUTTON, DKPN=SW415-ND, GateName_1=G$1, LibraryName=HyTechDevices, MOPN=653-B3S-1000, SymbolName_1=BUTTON
STM32: "32-Bit MCU+DSP 512K Flash 180MHz LQFP64 STMicroelectronics STM32F446RET6, 32bit ARM Cortex M4 MCU, 180MHz, 512 kB Flash, 64-Pin LQFP", Manufacturer_Name=STMicroelectronics, Mouser Part Number=511-STM32F446RET6, Datasheet Link=https://datasheet.datasheetarchive.com/originals/distributors/DKDS41/DSANUWW0028583.pdf, Geometry.Height=1.6mm, Manufacturer_Part_Number=STM32F446RET6, Mouser Price/Stock=https://www.mouser.co.uk/ProductDetail/STMicroelectronics/STM32F446RET6?qs=Ok1pvOkw6%2FqpQsWf8F4wtQ%3D%3D
U2: library part TCAN1051*V-Q1, Manufacturer="Texas Instruments", MPN=TCAN1051HGVDRQ1, Package="SOIC-08(NARROW,0.15\")", DeviceSetName=TCAN1051*V-Q1, DKPN=296-49935-1-ND, GateName_1=G$1, LibraryName=HyTechDevices, MOPN=595-TCAN1051HGVDQ1, SymbolName_1=CAN_TRANSCIEVER_TCAN1051*V
U3: library part CONNECTOR_ST_LINK
X1: library part CRYSTAL_SMD3225-4P, FREQUENCY=24Mhz, LOAD_CAPACITANCE=10pF, Manufacturer="Yangxing Tech", MPN=X322524MMB4SI, Package=SMD3225-4P, SHUNT_CAPACITANCE="2 - 5 pF", DeviceSetName=CRYSTAL_*, DKPN=XC2566CT-ND, GateName_1=G$1, LibraryName=HyTechDevices, MOPN=X322524MMB4SI, SymbolName_1=CRYSTAL

## Via types
v1: diameter 20, hole 13, Top Layer(SIG/PWR) to Bottom Layer(SIG/PWR), tented both sides, 77 vias
v2: diameter 27, hole 20, Top Layer(SIG/PWR) to Bottom Layer(SIG/PWR), tented both sides, 74 vias
v3: diameter 50, hole 28, Top Layer(SIG/PWR) to Bottom Layer(SIG/PWR), tented both sides, 12 vias

## Nets (pads, with @x,y where several pads share a name; then routed paths per layer and width w, separated by ;. In a path a pad name is that pad's centre, name@x,y a point inside that pad or via, vN(x,y) a via of type N, cw(c..) or ccw(c..) an arc to the next point about the centre after c; other vN are vias at no path point)
3V3_BOOT: B1.6 C11.2 | length 53.8
  Top Layer(SIG/PWR) w20: C11.2@3255,4211 3255.22,4210.79 3255.22,4157.62 B1.6@3255.43,4157.4
3V3_EN: B1.5 R5.2 | length 192
  Top Layer(SIG/PWR) w12: R5.2@3241.54,4265 3239.58,4265 3229.83,4255.25 3229.83,4253.29 3216,4239.46 3216,4127.03 3223.03,4120 B1.5@3255.43,4120
3V3_FB: B1.4 C22.2 R7.2 R8.1 | length 222
  Top Layer(SIG/PWR) w12: C22.2@3095,4024.06 3096.6,4022.46 R7.2@3185,4022.46 R8.1@3256,4022.46 3256,4082.03 B1.4@3255.43,4082.6
3V3_SW: B1.2 C11.1 L2.1 | length 359.3
  Top Layer(SIG/PWR) w12: C11.1@3291.22,4211 3297,4205.22 3297,4153 3323.8,4126.21 3352.37,4126.21 B1.2@3358.57,4120
  Top Layer(SIG/PWR) w17: B1.2@3358.57,4120 3532.43,4120 3557.24,4095.2 L2.1@3572,4095.2
7SEG_LOAD: B4.12 STM32.50 | length 859.8
  Top Layer(SIG/PWR) w11.5: STM32.50@4002.95,3600.91 4002.95,3556.05 v1(4013,3546) ; v1(4686,3436) 4686.5,3435.5 4765.01,3435.5 B4.12@4765.51,3435
  Bottom Layer(SIG/PWR) w11.5: v1(4013,3546) 4129,3546 4131.75,3548.75 4573.25,3548.75 v1(4686,3436)
+3V3: 3V3.1 B3.1 B3.5 C5.2 C6.2 C7.2 C8.2 C9.2 C10.1 C14.2 C20.1 C21.1 C22.1 C26.2 JP1.1 L2.2 R1.1 R7.1 R13.1 STM32.1 STM32.13 STM32.19 STM32.32 STM32.48 STM32.64 U2.5 U3.1 | length 7228.9
  Top Layer(SIG/PWR) w11.5: C22.1@3095,3905.94 3149.06,3905.94 3185,3870 ; C14.2@3168.89,2719 3168.73,2718.84 3168.73,2682.61 B3.5@3168.57,2682.45 3202.55,2682.45 3261.45,2623.55 3292.43,2623.55 B3.1@3292.58,2623.39 3360.39,2623.39 ; R7.1@3185,3955.54 3185,3870 ; 3477.12,3818.12 3443,3784 3229,3784 3185,3828 3185,3870 ; STM32.13@3649.09,3286.42 3751,3286.42 3787.58,3286.42 ; C7.2@3760,3054.11 3760.39,3054.11 3766.73,3060.45 3766.73,3195.24 3811.49,3240 3834,3240 ; 4008,3467 4008,3506 4024.64,3522.64 STM32.48@4100.91,3522.64 4101.06,3522.79 4180.68,3522.79 C9.2@4180.89,3523 ; 4022.64,3225.36 4022.64,3125.96 4051,3097.6 C8.2@4051,3016.11 ; U2.5@4555,2243.5 4555,2185 4520,2150 4520,2010 4563.46,1966.54 R13.1@4563.46,1840
  Top Layer(SIG/PWR) w15: 3360.39,2623.39 3389,2652
  Top Layer(SIG/PWR) w20: 3389,2652 3590,2853 3590,3098.43 3751,3259.43 3751,3286.42 3751,3323 ; 3V3.1@3725,3760 v3(3960,3760) ; 4008,3263 4022.64,3248.36 4022.64,3225.36 4105,3143 4105,2885 4240,2750 ; JP1.1@4240.71,2559.29 4240,2560 4240,2750 ; C26.2@4491.55,2243.06 4457.94,2243.06 4370,2331 4370,2620 4240,2750 ; U3.1@4659,4198 4752,4198 4800,4150 R1.1@4800,4033.46
  Top Layer(SIG/PWR) w23.5: C26.2@4492,2243 4492.06,2243.06 4554.56,2243.06 U2.5@4555,2243.5
  Top Layer(SIG/PWR) w25: C10.1@3650,3600.94 3751,3499.94 3751,3323 3787.58,3286.42 3834,3240 3985,3240 4008,3263 4008,3467
  Top Layer(SIG/PWR) w40: C21.1@3477.12,3884 3477.12,3818.12 3477.12,3642.88 3519.06,3600.94 C10.1@3650,3600.94
  Top Layer(SIG/PWR) w50: 3578.78,3818.22 3622,3775 3710,3775 3V3.1@3720,3765
  Bottom Layer(SIG/PWR) w20: v3(3960,3760) 4185,3760 4222.2,3797.2 4222.2,3809.04 4604.96,4191.81 4652.81,4191.81 U3.1@4659,4198
+5V: 5V.1 B1.3 B3.8 B4.19 C12.2 C13.1 C19.1 C24.2 C25.2 C28.2 C29.2 D1.2 D2.2 F1.2 J2.5 J2.6 J2.7 LED1.1 LED2.1 LED3.1 LED4.1 LED5.1 LED6.1 R4.2 R5.1 R14.1 U2.3 | length 10594.8
  Top Layer(SIG/PWR) w11.5: LED2.1@3132.58,2437.89 LED2.1@3147.48,2422.99 ; B3.8@3168.57,2623.39 B3.8@3168.41,2623.24 ; C13.1@3169,2580 3169,2623.24 B3.8@3168.41,2623.24 ; 3210,2476 3166,2476 3132.58,2509.42 3132.58,2602.92 3152.89,2623.24 B3.8@3168.41,2623.24 ; 4015,2070 4040.01,2095.01 4040.01,2122.29 J2.5@4040.16,2122.44 4040.08,2122.52 4040.08,2171.81 C28.2@4040,2171.89 4040.39,2171.89 4059.84,2152.44 J2.6@4059.84,2122.44 4059.84,2089.84 4040,2070 ; 4059.84,2153.12 4078.61,2171.89 C29.2@4079,2171.89 ; 4060,2070 4079.38,2089.38 J2.7@4079.38,2122.6 ; C29.2@4079.38,2171.51 J2.7@4079.38,2122.6 ; J2.7@4079.53,2122.44 J2.7@4079.38,2122.6 ; R14.1@4563.46,1750 v1(4670,1750)
  Top Layer(SIG/PWR) w20: C12.2@4244.11,3127 4244.34,3126.77 4300.77,3126.77 R4.2@4301,3126.54 ; v1(4266,3033) v1(4301,3068) R4.2@4301,3126.54 ; B4.19@4394.49,3135 4307.5,3135 4301,3128.51 R4.2@4301,3126.54
  Top Layer(SIG/PWR) w21: 4040,2070 4060,2070
  Top Layer(SIG/PWR) w23.5: v2(4484,2392) 4580.28,2392 4601.75,2413.47 4601.75,2452.75 4611.89,2462.89 C25.2@4611.89,2549
  Top Layer(SIG/PWR) w24.5: 3442,2476 3486,2476 3530,2520 3530,2545 ; 3530,2625 3550,2645 v2(3630,2645) ; v2(3785,2256) 3785,2170 3885,2070 4015,2070 4040,2070
  Top Layer(SIG/PWR) w25: v2(3430,2645) 3510,2645 3530,2625 ; LED6.1@3507.48,2082.99 3501.57,2082.99 3436.56,2148 3212.49,2148 3164.51,2100.02 3164.51,2094.11 3153.39,2082.99 LED5.1@3147.48,2082.99 3141.57,2082.99 3130.45,2071.87 3130.45,2065.96 3098.49,2034 2816.47,2034 2784.51,2065.96 2784.51,2071.87 2773.39,2082.99 LED4.1@2767.48,2082.99 2761.57,2082.99 2750.45,2094.11 2750.45,2100.02 2704,2146.47 2704,2361.43 2750.45,2407.88 2750.45,2411.87 2761.57,2422.99 LED1.1@2767.48,2422.99 2837.01,2422.99 2890,2370 3094.49,2370 3130.45,2405.96 3130.45,2411.87 3141.57,2422.99 LED2.1@3147.48,2422.99 3158.6,2434.11 3168.11,2434.11 3210,2476 3442,2476 3483.89,2434.11 3496.36,2434.11 LED3.1@3507.48,2422.99 ; 3530,2545 3530,2625 ; v2(3530,2645) 3530,2625
  Top Layer(SIG/PWR) w45: D2.2@3532.05,4245 3532.05,4228.66 3534.55,4226.16 3583.84,4226.16 3699.55,4110.45 3699.55,4077.5 D1.2@3702.05,4075 3701.99,4074.94 3701.99,3915.06 F1.2@3701.93,3915
  Top Layer(SIG/PWR) w50: 5V.1@3070,4265 3080,4275 3115,4275 3161,4321 3334,4321 v2(3405,4250)
  Bottom Layer(SIG/PWR) w11.5: v2(4484,2392) 4450,2358 4450,1840 4540,1750 v1(4670,1750)
  Bottom Layer(SIG/PWR) w20: v2(3630,2645) 3865,2880 4113,2880 v1(4266,3033) v1(4301,3068)
  Bottom Layer(SIG/PWR) w24.5: 3750,2525 3785,2490 ; v2(3785,2256) 3785,2490 ; v2(4484,2392) 3883,2392 3785,2490
  Bottom Layer(SIG/PWR) w35: v2(3630,2645) 3750,2525
  Bottom Layer(SIG/PWR) w50: v2(3445,4210) v2(3405,4210) v2(3365,4210) 3335,4210 3295,4250 ; v2(3445,4250) v2(3405,4250) v2(3365,4250) 3295,4250 ; v2(3630,2645) v2(3530,2645) v2(3430,2645) 2890,3185 2890,4150 2990,4250 3295,4250
+5VIN: 5VIN.1 F1.1 J3.A4 J3.A9 J3.B4 J3.B9 | length 1052.9
  Top Layer(SIG/PWR) w22: J3.A9@4124.54,4113.56 4124.54,4047.03 4156,4015.58 v3(4156,4008) ; v3(4294,4009) 4294,4014.75 4315.14,4035.89 J3.A4@4315.14,4113.56
  Top Layer(SIG/PWR) w40: F1.1@3818.07,3915 3818.07,3927.99 3820.91,3930.83 3855.83,3930.83 v3@3898.09,3973.09 ; v3(3900,3975) 3902.71,3975 3950.54,4022.84 v3@3991.69,4022.84 ; 5VIN.1@3925,3875 3925,3884.22 3991.69,3950.91 v3@3991.69,4022.84 ; v3(3993.6,4024.75) v3@3991.69,4022.84
  Bottom Layer(SIG/PWR) w40: v3@3901.91,3976.91 3949.75,4024.75 v3(3993.6,4024.75) 3993.6,4025 4040,4025 4057,4008 v3(4156,4008) 4156.5,4008.5 4293.5,4008.5 v3(4294,4009)
+24VIN: 24V.1 J4.1 R15.1 | length 1315.1
  Top Layer(SIG/PWR) w11.5: R15.1@4563.46,1660 5120,1660 5150,1690 5150,1760 5186.75,1796.75 5186.75,1821.81 5206,1841.06 J4.1@5238.5,1841.06
  Top Layer(SIG/PWR) w25: 24V.1@4920,2045 5125.25,2045 5281.33,1888.92 5281.33,1853.56 5268.83,1841.06 J4.1@5238.5,1841.06
CAN_HIGH: CAN_HI.1 J4.4 R9.1 U2.7 | length 1271.4
  Top Layer(SIG/PWR) w11.5: U2.7@4655,2243.5 R9.1@4655,2147.46 4655,2145.5 4693,2107.5 4693,2034 4660,2001 4660,1986 4689,1957 5108,1957 5155.21,1909.78 5155.21,1806.22 5123,1774 5070,1774 5058.44,1762.44 5058.44,1724.88 J4.4@5056.5,1722.94 4859.06,1722.94 CAN_HI.1@4858,1724
CAN_LOW: CAN_LO.1 J4.3 R12.2 U2.6 | length 1251.5
  Top Layer(SIG/PWR) w11.5: U2.6@4605,2243.5 R12.2@4605,2147.46 4605,2145.5 4568,2108.5 4568,2034 4668,1934 5093,1934 5134,1893 5134,1816 5113,1795 5070,1795 5059.45,1805.55 5059.45,1838.11 J4.3@5056.5,1841.06 4857.06,1841.06 CAN_LO.1@4856,1840
DIGIT_1: B4.2 B5.12 | length 216.5
  Top Layer(SIG/PWR) w11.5: B4.2@4765.51,2935 4946.73,2935 4963.73,2918 B5.12@4975,2918
DIGIT_2: B4.11 B5.9 | length 500.1
  Top Layer(SIG/PWR) w11.5: B4.11@4765.51,3385 4790.61,3385 4802.93,3372.68 5024.32,3372.68 5054.26,3342.74 5054.26,3235.26 5037,3218 B5.9@4975,3218
DIGIT_3: B4.6 B5.8 | length 430.3
  Top Layer(SIG/PWR) w11.5: B4.6@4765.51,3135 4758.47,3142.05 4717.95,3142.05 4708,3152 4708,3203.26 4714.74,3210 4867,3210 B5.8@4975,3318
DIGIT_4: B4.7 B5.6 | length 916.2
  Top Layer(SIG/PWR) w11.5: B4.7@4765.51,3185 4889.55,3185 4901.87,3172.68 5329.68,3172.68 B5.6@5575,3418